# Altium PCB m.2 mk2.PcbDoc
Units mil, origin at the board's own origin, x right, y up, seen from the top; angles counter-clockwise.
Board outline 866.14 x 1181.1 mil, 2 copper layers (Top Layer, Bottom Layer), stack 31.1 mil thick; 19 components, 19 nets, 128 pads, 16 vias.
Unrouted connection lines stored in the file: 2.
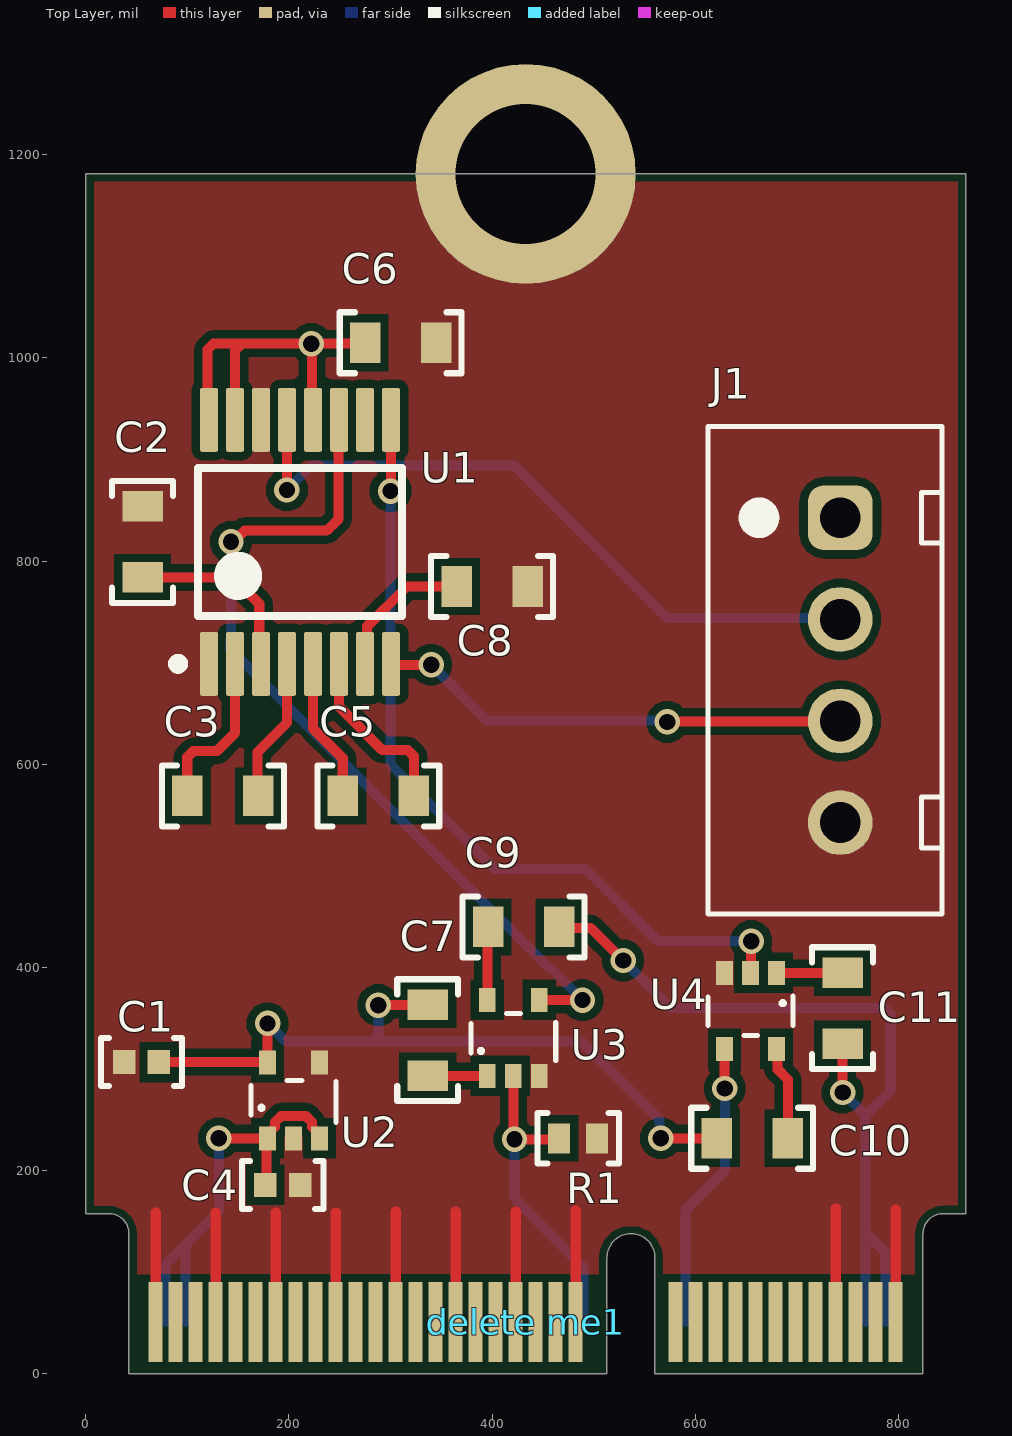
[diagram p0: Top Layer view]
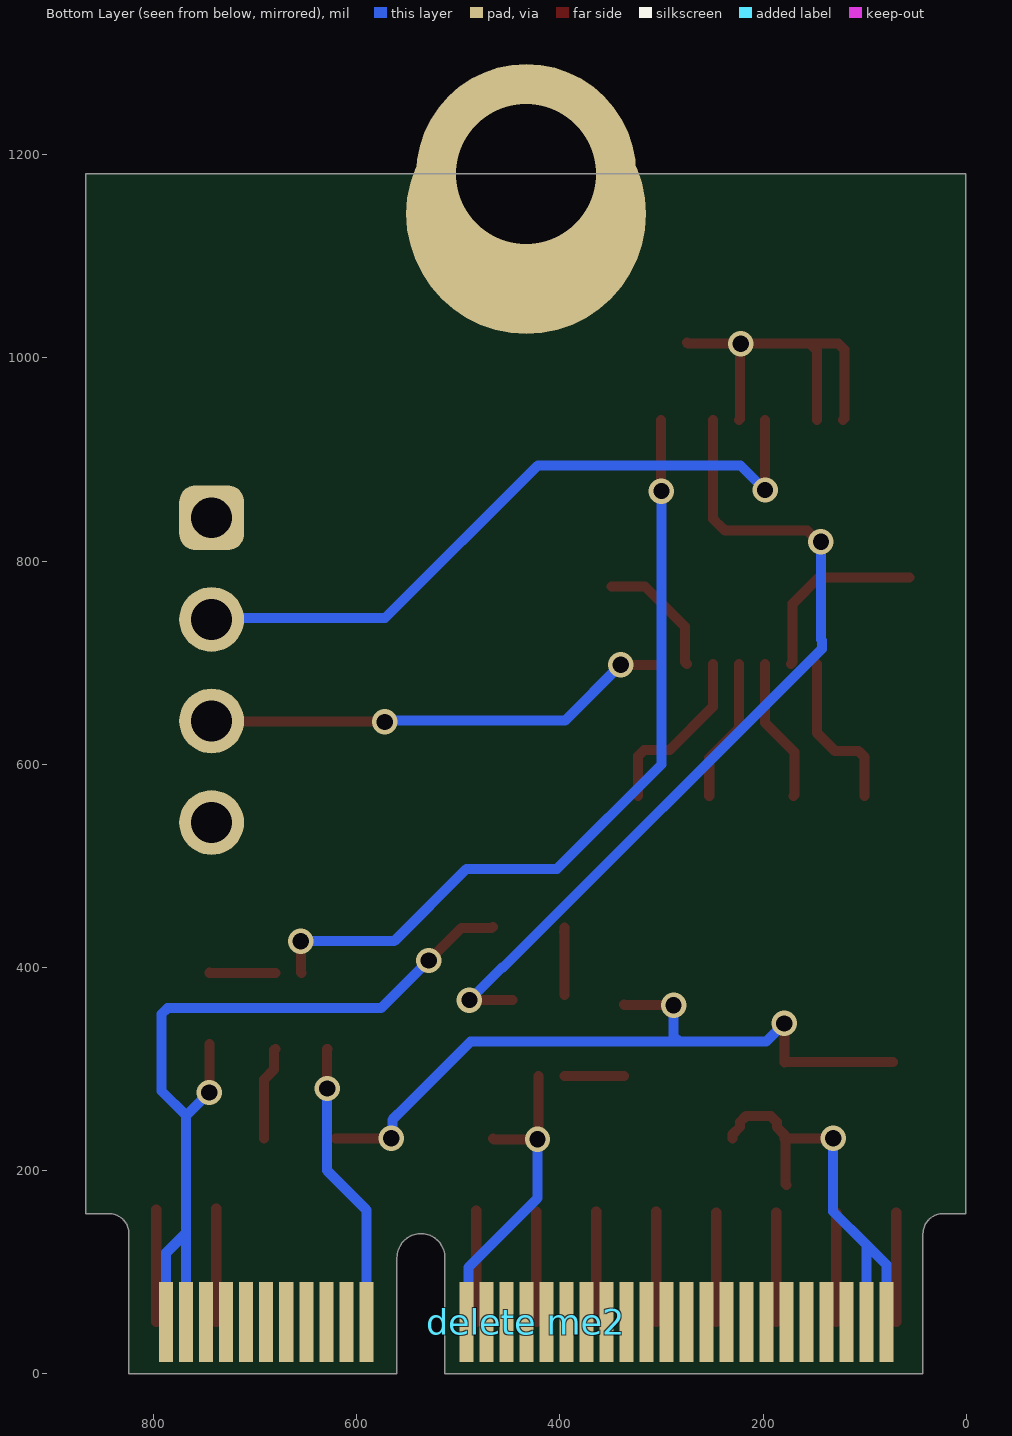
[diagram p1: Bottom Layer view, seen from below]
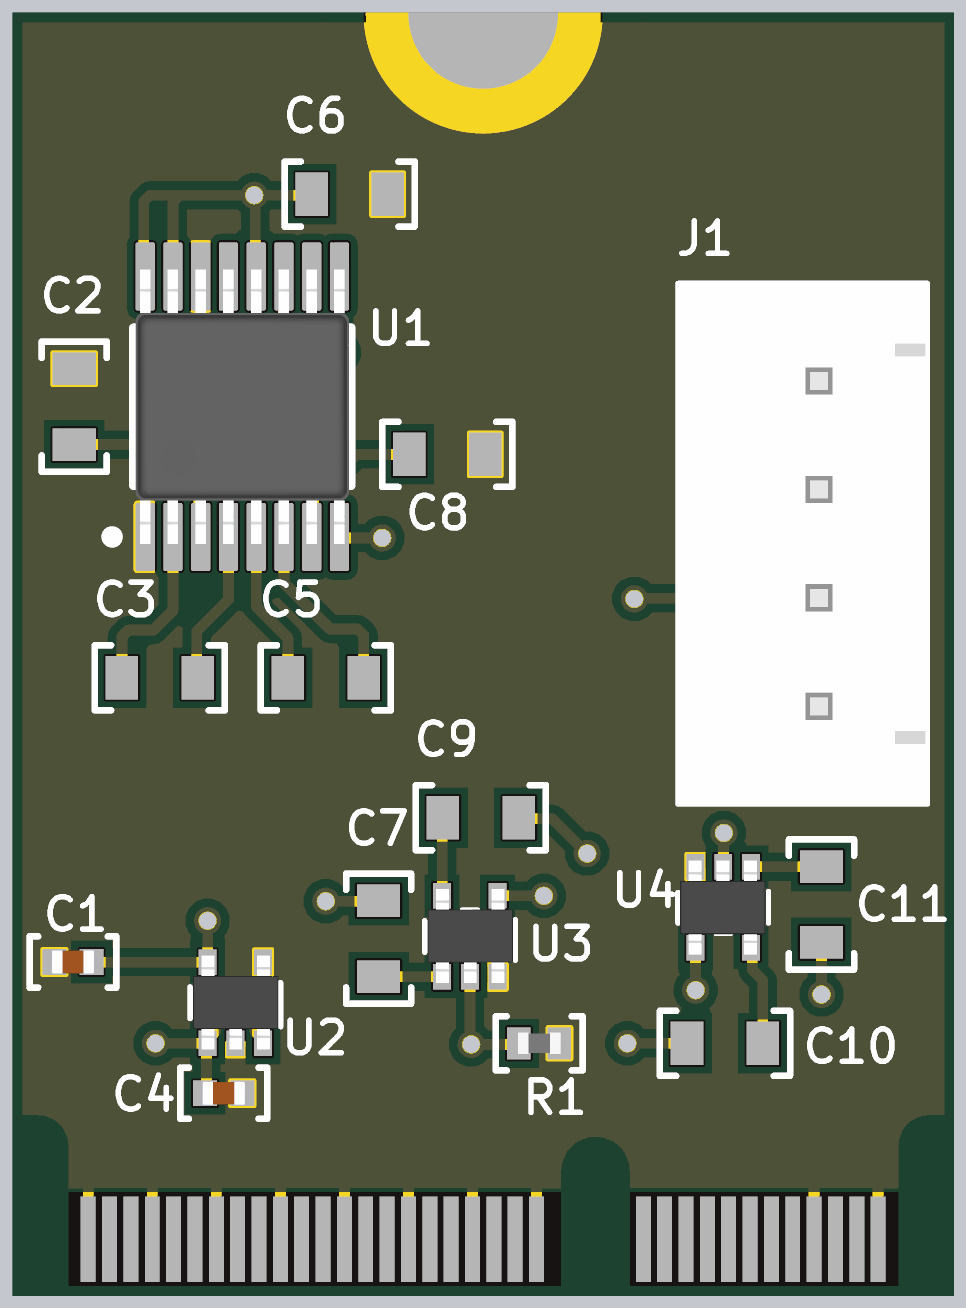
[diagram p2: 3D render of the assembled board from above, using the file's embedded part models]

## Layer stack, top to bottom
Top Solder: solder mask 0.4, Solder Resist, Dk 3.5
Top Layer: signal copper 1.4
Dielectric 1: dielectric 28.3, FR-4, Dk 4.8
Bottom Layer: signal copper 1.4
Bottom Solder: solder mask 0.4, Solder Resist, Dk 3.5

## Board outline
42.57,0.25 42.57,138.05 ccw(c22.89,138.05) 22.89,157.73 0.25,157.73 0.25,1181.35 866.39,1181.35 866.39,157.73 843.75,157.73 ccw(c843.75,138.05) 824.07,138.05 824.07,0.25 560.29,0.25 560.29,114.42 ccw(c536.67,114.42) 513.05,114.42 513.05,0.25

## Design rules (kind name [scope] priority, off if disabled: settings)
AcuteAngle [All] p1 off: minimum=6.00000000000000E+0001 checktracksonly=FALSE
BoardOutlineClearance "BoardOutlineClearance JLCPCB" [All] p1: gap=7.87 ignorepadtopadclearanceinfootprint=FALSE
Clearance "Clearance JLCPCB 1oz" [All] p1: gap=7.87 ignorepadtopadclearanceinfootprint=FALSE except(5: Arc-Arc Arc-Track Arc-SMDPad Track-Track Track-SMDPad SMDPad-SMDPad; 10: Arc-Hole Track-Hole SMDPad-Hole THPad-Hole Via-Hole Fill-Hole Poly-Hole Region-Hole Text-Hole)
DiffPairsRouting [All] p1: maxlimit=10 minlimit=6 mostfreqgap=8 toplayer_minwidth=8 toplayer_maxwidth=15 toplayer_prefwidth=8 bottomlayer_minwidth=8 bottomlayer_maxwidth=15 bottomlayer_prefwidth=8 maxuncoupledlength=500
HoleSize "HoleSize JLCPCB Pad" [IsPad] p1: absolutevalues=TRUE maxlimit=248.03 minlimit=19.68 maxpercent=80.000 minpercent=20.000
HoleSize "HoleSize JLCPCB 2 layer" [All] p2: absolutevalues=TRUE maxlimit=248.03 minlimit=11.81 maxpercent=80.000 minpercent=20.000
HoleToHoleClearance "HoleToHoleClearance JLCPCB" [All] p1: gap=10 allowstackedmicrovias=TRUE
MinimumAnnularRing "MinimumAnnularRing JLCPCB Pad" [IsPad] p1: minimumring=11.81
MinimumAnnularRing "MinimumAnnularRing JLCPCB 1oz" [All] p2: minimumring=5.12
MinimumSolderMaskSliver [All] p1: minsoldermaskwidth=1
PlaneConnect [All] p1: planeconnectstyle=Direct reliefexpansion=20 reliefentries=4 reliefconductorwidth=10 reliefairgap=10
PolygonConnect "PolygonConnect 3V3" [InNet('3V3')] p1: thpad.connectstyle=Relief thpad.reliefconductorwidth=10 thpad.reliefentries=4 thpad.polygonreliefangle="90 Angle" thpad.airgapwidth=10 smdpad.connectstyle=Relief smdpad.reliefconductorwidth=10 smdpad.reliefentries=4 smdpad.polygonreliefangle="90 Angle" smdpad.airgapwidth=10 via.connectstyle=Direct via.reliefconductorwidth=10 via.reliefentries=4 via.polygonreliefangle="90 Angle" via.airgapwidth=10
PolygonConnect "PolygonConnect Direct Connect" [All] p2: connectstyle=Direct reliefconductorwidth=15 reliefentries=4 polygonreliefangle="45 Angle" airgapwidth=10
RoutingVias "RoutingVias JLCPCB" [All] p1: holewidth=15.75 width=31.5 viastyle="Through Hole" minholewidth=11.81 minwidth=15.75 maxholewidth=28 maxwidth=50
SilkToSilkClearance [All] p1: silktosilkclearance=3
SilkToSolderMaskClearance "SilkToSolderMaskClearance JLCPCB" [IsPad] p1: minsilkscreentomaskgap=5.91 clearancetoexposedcopper=TRUE
SolderMaskExpansion "SolderMaskExpansion JLCPCB" [All] p1: expansion=1.97 istentingtop=FALSE
Width "Width JLCPCB 2oz" [All] p1: maxlimit=200 minlimit=7.87 preferedwidth=10 minimp=50.000000 maximp=50.000000 favimp=50.000000
23 further rules are at their usual default settings.

## Classes and differential pairs
component class jetson_agx_m.2: C1 C3 C5 C6 C7 C8 C9 C10 C11 J1 "m.2 bottom" "m.2 top" R1 U1 U2 U4

## Components (designator, comment, footprint, x,y, rotation, side; value= is the part's Value field where it differs from the comment)
C1 "1uF Ceramic 16V" CAPACITOR_0402 54.87,307 r180 top value=1uF
C2 "100nF Ceramic 6.3V" CAPACITOR_0603 56,819 r90 top value=0.1uF
C3 "100nF Ceramic 6.3V" CAPACITOR_0603 135,569 r0 top value=0.1uF
C4 "1uF Ceramic 16V" CAPACITOR_0402 193.87,186 r0 top value=1uF (schematic designator C2)
C5 "100nF Ceramic 6.3V" CAPACITOR_0603 288,569 r0 top value=0.1uF
C6 "100nF Ceramic 6.3V" CAPACITOR_0603 310,1015 r0 top value=0.1uF
C7 "100nF Ceramic 6.3V" CAPACITOR_0603 336.62,328.5 r270 top value=0.1uF
C8 "100nF Ceramic 6.3V" CAPACITOR_0603 400,775 r0 top value=0.1uF
C9 "100nF Ceramic 6.3V" CAPACITOR_0603 431,440 r180 top value=0.1uF
C10 "100nF Ceramic 6.3V" CAPACITOR_0603 656,232 r180 top value=0.1uF
C11 "100nF Ceramic 6.3V" CAPACITOR_0603 745,360 r90 top value=0.1uF
"delete me1" "M.2 (TOP)" "M.2 (top)" 797.24,51.18 r0 top (schematic designator "m.2 top")
"delete me2" "M.2 (BOTTOM)" "M.2 (bottom)" 787.4,51.18 r0 top (schematic designator "m.2 bottom")
J1 "XH2.54 VERT" CONN_JST_XH254_4POS_VERT 742.69,842.69 r270 top
R1 "10k Ohm 1% 1/16W" RESISTOR_0402 484.7,232 r0 top
U1 "SN65C3221EPWR" PW0016A_M 211,819 r90 top (schematic designator U3)
U2 "TLV70018DCKR" SOT-353 204.59,232 r0 top (schematic designator U1)
U3 "FXLP34P5X" SOT-353 420.86,293.31 r0 top (schematic designator U2)
U4 "FXLP34P5X" SOT-353 654.41,394.8 r180 top

## Footprints (in the part's own frame and the unit in brackets; to place one, negate y for a bottom-side part, rotate by r counter-clockwise, add the part's x,y. Pads: shape width x height; smd on the part's side, far side on the other; paste and mask are expansions set on the pad)
CAPACITOR_0402 [mm]
  rect 0.56x0.6 smd: 1(-0.435,0) 2(0.435,0)
  silkscreen extent -1.02,-0.6 1.02,0.6, body extent -0.5,-0.28 0.5,0.27, height 0.51
CAPACITOR_0603 [mil] "CAPACITOR 0603"
  rect 30x40 smd: 1(-35,0) 2(35,0)
  silkscreen extent -60,-30 60,30, body extent -31,-16 32,16, height 31
CONN_JST_XH254_4POS_VERT [mm] "JST XH 2.54mm Pitch 4 Pos Vertical"
  rrect50% 1.62x1.62 hole 1.02: 1(0,0)
  round 1.62 hole 1.02: 2(2.54,0) 3(5.08,0) 4(7.62,0)
  silkscreen extent -2.29,-3.3 9.91,2.54, body extent -2.34,-3.35 9.96,2.49, height 7.21
"M.2 (bottom)" [mm]
  rect 0.35x2 smd far side: 2(0,0) 4(-0.5,0) 6(-1,0) 8(-1.5,0) 10(-2.001,0) 12(-2.501,0) 14(-3.001,0) 16(-3.501,0) 18(-4.001,0) 20(-4.501,0) 22(-5.001,0) 32(-7.501,0) 34(-8.002,0) 36(-8.502,0) 38(-9.002,0) 40(-9.502,0) 42(-10.002,0) 44(-10.502,0) 46(-11.002,0) 48(-11.502,0) 50(-12.003,0) 52(-12.503,0) 54(-13.003,0) 56(-13.503,0) 58(-14.003,0) 60(-14.503,0) 62(-15.003,0) 64(-15.503,0) 66(-16.004,0) 68(-16.504,0) 70(-17.004,0) 72(-17.504,0) 74(-18.004,0)
"M.2 (top)" [mm] "M.2 E-Key Fingers on the top side"
  rect 0.35x2 smd: 1(0,0) 3(-0.5,0) 5(-1,0) 7(-1.5,0) 9(-2,0) 11(-2.5,0) 13(-3,0) 15(-3.5,0) 17(-4,0) 19(-4.5,0) 21(-5,0) 23(-5.5,0) 33(-8,0) 35(-8.5,0) 37(-9,0) 39(-9.5,0) 41(-10,0) 43(-10.5,0) 45(-11,0) 47(-11.5,0) 49(-12,0) 51(-12.5,0) 53(-13,0) 55(-13.5,0) 57(-14,0) 59(-14.5,0) 61(-15,0) 63(-15.5,0) 65(-16,0) 67(-16.5,0) 69(-17,0) 71(-17.5,0) 73(-18,0) 75(-18.5,0)
PW0016A_M [mm] "SOP, 16-Leads, Body 5.1x4.5mm, Pitch 0.65mm, IPC Low Density"
  rrect22% 1.6x0.45 smd: 1(-3.05,2.275) 2(-3.05,1.625) 3(-3.05,0.975) 4(-3.05,0.325) 5(-3.05,-0.325) 6(-3.05,-0.975) 7(-3.05,-1.625) 8(-3.05,-2.275) 9(3.05,-2.275) 10(3.05,-1.625) 11(3.05,-0.975) 12(3.05,-0.325) 13(3.05,0.325) 14(3.05,0.975) 15(3.05,1.625) 16(3.05,2.275)
  silkscreen extent -3.17,-2.55 1.85,3.17, body extent -3.21,-2.5 3.21,2.5, height 1
RESISTOR_0402 [mm] "Resistor 0402"
  rect 0.55x0.75 smd: 1(-0.475,0) 2(0.475,0)
  silkscreen extent -1.02,-0.64 1.02,0.64, body extent -0.5,-0.25 0.5,0.25, height 0.25
SOT-353 [mm]
  rect 0.42x0.6 smd: 1(-0.65,0) 2(0,0) 3(0.65,0) 4(0.65,1.9) 5(-0.65,1.9)
  silkscreen extent -1.06,0.39 1.06,1.45, body extent -0.99,-0.14 1.01,2.06, height 0.96

## Part data
C1 C4: library part CAPACITOR_1uF_0402, "Cap 1uF 16V +/-10% / Ceramic 0402", Supplier Part Number 1=478-0402YD105KAT4ADKR-ND, Tolerance="+/- 10%", Voltage=16V, Made By="Robert Pafford", Supplier 1=Digi-Key
C2: library part CAPACITOR_0.1uF_0603, "Cap 100nF 6.3V +/-10% / Ceramic 0603", Supplier Part Number 1=399-15351-1-ND, Tolerance="+/- 10%", Voltage=6.3V, ComponentLink1Description=Datsheet, ComponentLink1URL=https://www.mouser.com/datasheet/2/212/KEM_C1002_X7R_SMD-1102033.pdf, Made By="Flip B", Supplier 1=Digi-Key
C3 C5 C6 C7 C8 C9 C10 C11: library part CAPACITOR_0.1uF_0402, "Cap 100nF 25V +/-10% / Ceramic 0402", Supplier Part Number 1=478-7868-1-ND, Tolerance="+/- 10%", Voltage=25V, Made By="Robert Pafford", Supplier 1=Digi-Key
"delete me1": "M.2 E-Key top fingers", Created by="Ethan Rosati"
J1: library part "CONN HEADER SMD R/A 3POS 2.54MM", "Connector Header Surface Mount, Right Angle 3 position 0.100\" (2.54mm)", Circuits=3, Created by="Ethan Rosati"
R1: library part RESISTOR_10K_0402, "RES 10k OHM 1% 1/16W 0402", Digikey Part Numer=CR0603-JW-104ELFTR-ND, Supplier Part Number 1=YAG3436CT-ND, Tolerance="+/- 1%", Value  (Ohms)=10K, Made By="Robert Pafford", Supplier=Digikey, Supplier 1=Digi-Key, Wattage=1/16W
U1: library part CMP-0299-01595-2, "3-V to 5.5-V Single-Channel RS-232 1-Mbit/s Line Driver / Receiver with ±15-kV IEC ESD Protection, -40 to 85 degC, 16-Pin SSOP (DB), Green (RoHS & no Sb/Br)", Drivers Per Package=1, Supply Voltage(s)(V)="3.3 or 5.0", ComponentLink1Description="Manufacturer URL", ComponentLink1URL=www.ti.com, ComponentLink2Description=Datasheet, ComponentLink2URL=http://www.ti.com/general/docs/lit/getliterature.tsp?genericPartNumber=SN65C3221E&fileType=pdf, ComponentLink3Description="Package Specification", ComponentLink3URL=http://www.ti.com/litv/pdf/mpds361, DatasheetVersion=SLLS694B, ESD HBM(kV)=+/-15, ICC(Max)(mA)=1, IEC-61000-4-2 SUPPORT=TRUE, PackageDescription="16-Pin Plastic Thin Small Outline Package 5 x 4.4 mm Body ,0.65 mm Pitch", PackageReference=PW0016A, PackageVersion="revG, Feb-2011", Receivers Per Package=1, RS-232=TRUE, Single Supply=TRUE, SubFamily=RS-232
U2: "Fixed Positive LDO Regulator, 1.8V, PMOS, PDSO5", Max Voltage="5.5 V", Min Voltage="2 V", Output Current="200 mA", Output Voltage="1.8 V", Supplier Part Number 1=595-TLV70018DCKR, Made By="Ethan Rosati", Supplier 1=Mouser
U3 U4: "Interface Circuit, CMOS, PDSO5", Max Voltage="3.6 V", Min Voltage="1.0 V", Supplier Part Number 1=FXLP34P5XCT-ND, Made By="Ethan Rosati", Supplier 1=Digikey
"delete me2": Created by="Ethan Rosati"

## Free pads (board coordinates)
  round 216.53 hole 137.79: 1(433.07,1181.1)
  round 236.22 smd far side: 2(433.07,1141.73)

## Via types
v1: diameter 25, hole 16, Top Layer to Bottom Layer, tented both sides, 16 vias

## Nets (pads, with @x,y where several pads share a name; then routed paths per layer and width w, separated by ;. In a path a pad name is that pad's centre, name@x,y a point inside that pad or via, vN(x,y) a via of type N, cw(c..) or ccw(c..) an arc to the next point about the centre after c; other vN are vias at no path point)
1.8V: C1.1 C7.1 C10.2 U2.5 | length 731.3
  Top Layer w9.84: C1.1 72.1,306.9 178.9,306.9 U2.5 v1(179,345) ; v1(288,363) 336.13,363 C7.1 ; v1(566,232) C10.2
  Bottom Layer w9.84: v1(179,345) 197.01,326.99 282.23,326.99 ; v1(288,363) 288,332.75 282.23,326.99 ; v1(566,232) 564.84,233.16 564.84,250.16 551.74,263.26 488.01,326.99 282.23,326.99
3V3: "delete me2.2" "delete me2.4" "delete me2.72" "delete me2.74" C4.1 C6.1 C9.1 C11.1 U1.12 U1.15 U1.16 U2.1 U2.3 | length 1685.6
  Top Layer w9.84: U1.16 120,940.51 120,1008.23 125.77,1014 153.77,1014 ; v1@130,233 v1(131,232) U2.1 ; U1.15 147.02,1007.26 153.77,1014 ; C4.1@176.87,186 177.94,187.06 177.94,230.94 U2.1 ; U1.12 222.9,939.98 222.9,1013.1 v1(222,1014) ; U2.3 230.18,235.54 222.78,242.94 222.78,247.92 216.97,253.73 192.21,253.73 186.4,247.92 186.4,242.94 179,235.54 U2.1 ; C6.1 274,1014 v1(222,1014) ; C9.1 467,439 497,439 v1(529,407) ; v1(745,277) C11.1 ; 153.77,1014 v1(222,1014)
  Bottom Layer w9.84: 78.58,51.18 78.58,107.58 98,127 ; 98.27,51.18 98,51.45 98,127 ; v1(131,232) 131,160 98,127 ; v1(529,407) 576,360 786.23,360 792,354.23 792,278.58 767.71,254.29 ; v1(745,277) 767.71,254.29 ; 767.71,51.18 767.71,139 ; 787.4,51.18 787.4,119.31 767.71,139 ; 767.71,139 767.71,254.29
Din: U1.11 U3.4 | length 851.4
  Top Layer w9.84: v1(143,819) 145.39,819 156.34,829.95 237.23,829.95 243,835.72 243.23,835.72 249,841.49 249,938.69 U1.11 ; U3.4 446.51,368.06 488.94,368.06 v1(489,368)
  Bottom Layer w9.84: v1(143,819) 143,722.82 142.08,721.9 142.08,713.74 455.82,400 457,400 v1(489,368)
DOUT: J1.2 U1.13 | length 687.4
  Top Layer w9.84: v1(198,870) 198.1,870.1 198.1,938.98 U1.13 ; J1.2@742.5,743.5 J1.2@743,743
  Bottom Layer w9.84: v1(198,870) 222.3,894.3 421.7,894.3 572,744 741.38,744 J1.2
GND: "delete me1.1" "delete me1.7" "delete me1.33" "delete me1.39" "delete me1.45" "delete me1.51" "delete me1.57" "delete me1.63" "delete me1.69" "delete me1.75" C1.2 C2.2 C4.2 C6.2 C8.2 J1.4 pad.1 pad.2 R1.2 U1.1 U1.14 U2.2 U2.4 U3.3 U4.3 | length 1090.5
  Top Layer w10: 68.89,51.18 68.89,158.89 ; 127.95,51.18 127.95,158.95 ; 187,51.18 187,159 ; 246.06,51.18 246.06,158.94 ; 305,160 305.11,159.89 305.11,51.18 ; 364,160 364.17,159.83 364.17,51.18 ; 423,160 423.22,159.78 423.22,51.18 ; 482,161 482.28,160.72 482.28,51.18 ; 738,163 738.19,162.81 738.19,51.18 ; 797,162 797.24,161.76 797.24,51.18
NetC3_1: C3.1 U1.2 | length 163
  Top Layer w10: C3.1 100,607.14 105.86,613 129,613 147.02,631.02 U1.2
NetC3_2: C3.2 U1.4 | length 142.4
  Top Layer w10: C3.2 169,570 169,612 198.2,641.2 U1.4
NetC4_1: C5.1 U1.5 | length 142
  Top Layer w10: U1.5 223.8,635.2 253,606 C5.1
NetC4_2: C5.2 U1.6 | length 175.1
  Top Layer w10: U1.6 249.39,656.61 292,614 317.14,614 323,608.14 C5.2
NetC5_1: C2.1 U1.3 | length 185.5
  Top Layer w10: C2.1 145,784 170.88,758.12 170.88,700.65 U1.3
NetC7_1: C8.1 U1.7 | length 125.9
  Top Layer w10: U1.7 276.71,700.65 276.71,735.49 316.22,775 349,775
NetC8_2: C7.2 U3.1 | length 58.7
  Top Layer w9.84: C7.2 336.8,293.31 U3.1
NetC9_2: C9.2 U3.5 | length 67.2
  Top Layer w9.84: U3.5@395.27,373.12 C9.2@395.27,439.27 ; C9.2@395.27,434.27 C9.2@396,435
NetC10_1: C10.1 U4.5 | length 92.6
  Top Layer w9.84: U4.5 681.09,318.91 681.09,299.81 691,289.9 C10.1
NetC11_2: C11.2 U4.1 | length 65.1
  Top Layer w9.84: U4.1 744.8,394.8 C11.2
RIN: J1.3 U1.8 | length 465.7
  Top Layer w9.84: U1.8 301.49,698 v1(340,698) ; v1(572.44,641.77) 573.05,642.38 742.38,642.38 J1.3@743,643
  Bottom Layer w9.84: v1(340,698) 395,643 v1@572,643
Rout: U1.9 U4.2 | length 797.8
  Top Layer w9.84: v1(300,869) 300.28,869.28 300.28,938.8 U1.9 ; U4.2 654.7,395.1 654.7,425.7 v1(655,426)
  Bottom Layer w9.84: v1(300,869) 300,600 403,497 492,497 563,426 v1(655,426)
UART_RX: "delete me2.22" U4.4 | length 284.8
  Top Layer w9.84: U4.4 628.91,319.91 628.91,281.09 v1(629,281)
  Bottom Layer w9.84: 590.5,51.18 590.5,161.57 629,200.06 v1(629,281)
UART_TX: "delete me2.32" R1.1 U3.2 | length 316
  Top Layer w9.84: U3.2 421,293.17 421,232 v1(422,231) 465,231 R1.1
  Bottom Layer w9.84: v1(422,231) 422,173 490.1,104.9 490.1,53.15 492.07,51.18
pads on no net: "delete me1.3" "delete me1.5" "delete me1.9" "delete me1.11" "delete me1.13" "delete me1.15" "delete me1.17" "delete me1.19" "delete me1.21" "delete me1.23" "delete me1.35" "delete me1.37" "delete me1.41" "delete me1.43" "delete me1.47" "delete me1.49" "delete me1.53" "delete me1.55" "delete me1.59" "delete me1.61" "delete me1.65" "delete me1.67" "delete me1.71" "delete me1.73" "delete me2.6" "delete me2.8" "delete me2.10" "delete me2.12" "delete me2.14" "delete me2.16" "delete me2.18" "delete me2.20" "delete me2.34" "delete me2.36" "delete me2.38" "delete me2.40" "delete me2.42" "delete me2.44" "delete me2.46" "delete me2.48" "delete me2.50" "delete me2.52" "delete me2.54" "delete me2.56" "delete me2.58" "delete me2.60" "delete me2.62" "delete me2.64" "delete me2.66" "delete me2.68" "delete me2.70" J1.1 U1.10

## Polygon pours and split planes (outlines as drawn)
GND on Top Layer "GND_L01_P003" (solid, pour order 3): 866.68,98 3.68,98 3.68,1209 866.68,1209
no net on Bottom Solder "NONET_L-01_P-001" (solid): 45,95 825,95 825,0 45,0
no net on Top Solder "soldermask begone (top)" (solid): 828,95 828,0 44,0 44,95

## Silkscreen, mask and mechanical layers (free items; w line width, h text height)
Mechanical 1:
  lines w0.5: 0.25,157.73 0.25,1181.35 866.39,1181.35 866.39,157.73 843.75,157.73 ccw(c843.75,138.05) 824.07,138.05 824.07,0.25 560.29,0.25 ; 0.25,198.73 22.89,198.73 ; 22.89,157.73 cw(c22.89,138.05) 42.57,138.05 42.57,0.25 513.05,0.25